# EAGLE board 5hp proto (EAGLE 9.2.2)
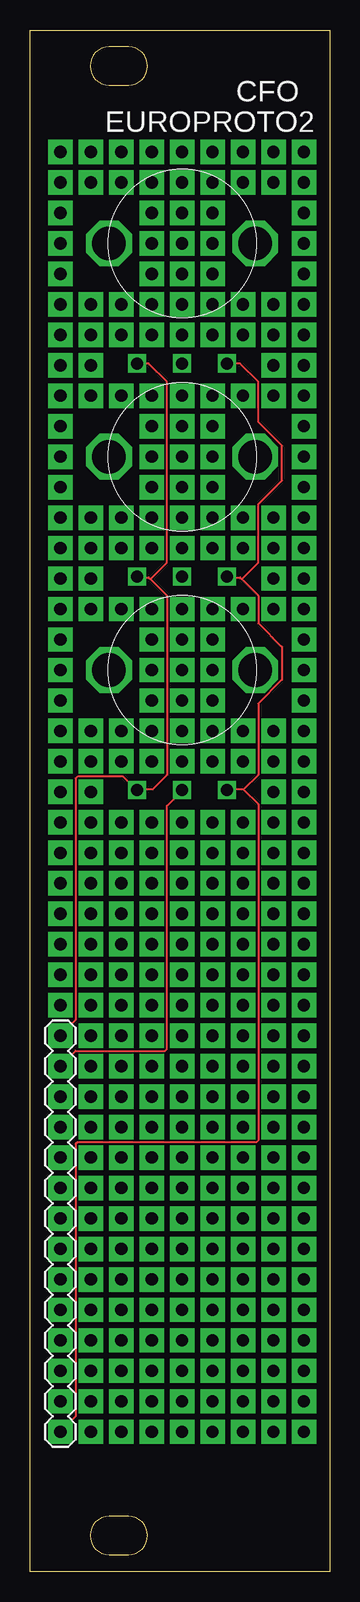
[diagram p0: board, top side]
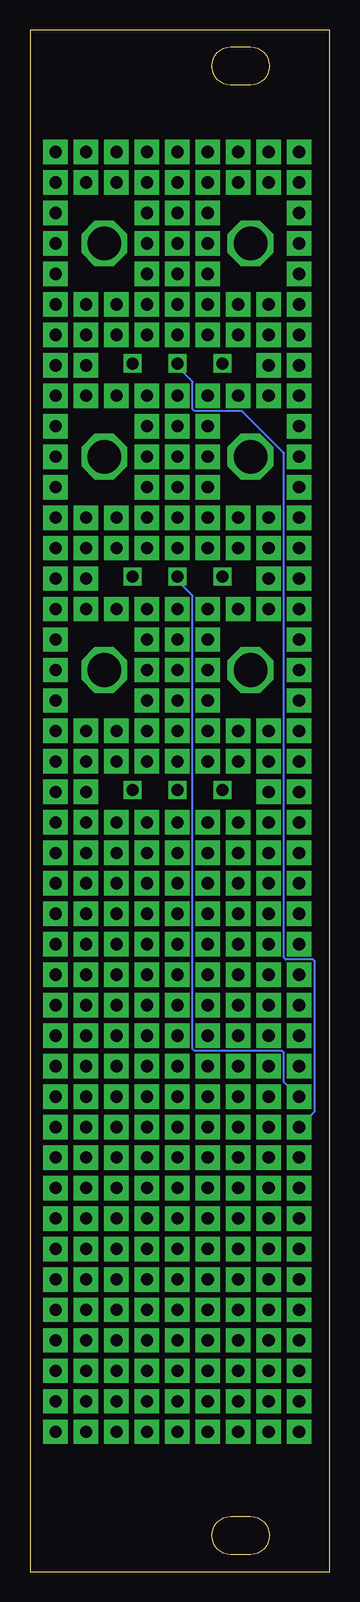
[diagram p1: board, bottom side, seen from below]

Size 25 x 128.5 mm. Coordinates in mm from the lower left corner, seen from the top.
Outline: 25,0 0,0 0,128.5 25,128.5 25,0
Outline: 8.21,127.1 6.62,127.1 6.29,127.07 5.99,126.97 5.72,126.83 5.48,126.63 5.29,126.4 5.14,126.12 5.05,125.82 5.01,125.5 5.05,125.18 5.14,124.88 5.29,124.61 5.48,124.37 5.72,124.17 5.99,124.03 6.29,123.93 6.62,123.9 8.21,123.9 8.54,123.93 8.84,124.03 9.11,124.17 9.35,124.37 9.54,124.61 9.69,124.88 9.78,125.18 9.81,125.5 9.78,125.82 9.69,126.12 9.54,126.4 9.35,126.63 9.11,126.83 8.84,126.97 8.54,127.07 8.21,127.1
Outline: 8.21,4.6 6.62,4.6 6.29,4.57 5.99,4.47 5.72,4.33 5.48,4.13 5.29,3.9 5.14,3.62 5.05,3.32 5.01,3 5.05,2.68 5.14,2.38 5.29,2.11 5.48,1.87 5.72,1.67 5.99,1.53 6.29,1.43 6.62,1.4 8.21,1.4 8.54,1.43 8.84,1.53 9.11,1.67 9.35,1.87 9.54,2.11 9.69,2.38 9.78,2.68 9.81,3 9.78,3.32 9.69,3.62 9.54,3.9 9.35,4.13 9.11,4.33 8.84,4.47 8.54,4.57 8.21,4.6
Copper layers (1*16): Top 0.035mm / dielectric 1.5mm / Bottom 0.035mm
Design rules "default": minimum track width 6mil, minimum drill 0.35mm, track to track 6mil, track to pad 6mil, pad to pad 6mil, via to via 6mil, smd to smd 6mil, copper to edge 40mil, drill to drill 6mil, minimum pad ring 10mil, minimum via ring 8mil, stop-mask expansion 4mil, vias tented up to drill 0mil, thermal gap 10mil

## Footprints (pad centres in the part's own frame; a part is rotated, then mirrored left to right if it is on the bottom)
1X14 = drill 1.016 pad 2.032 square: 1 0,0; 2 2.54,0; 3 5.08,0; 4 7.62,0; 5 10.16,0; 6 12.7,0; 7 15.24,0; 8 17.78,0; 9 20.32,0; 10 22.86,0; 11 25.4,0; 12 27.94,0; 13 30.48,0; 14 33.02,0
POT_V = drill 1 square: P1 -3.75,-10; P2 0,-10; P3 3.75,-10 | drill 1.016 pad 2.032 square: P$1 0,0; P$2 2.54,0; P$3 -2.54,0; P$4 -2.54,2.54; P$5 0,2.54; P$6 2.54,2.54; P$7 2.54,-2.54; P$8 0,-2.54; P$9 -2.54,-2.54; P$10 -2.54,5.08; P$11 0,5.08; P$12 2.54,5.08; P$13 5.08,5.08; P$14 7.62,5.08; P$15 -5.08,5.08; P$16 -7.62,5.08; P$26 -2.54,-7.62; P$27 0,-7.62; P$28 2.54,-7.62; P$29 5.08,-7.62; P$30 7.62,-7.62; P$31 -5.08,-7.62; P$32 -7.62,-7.62; P$33 -2.54,-5.08; P$34 0,-5.08; P$35 2.54,-5.08; P$36 5.08,-5.08; P$37 7.62,-5.08; P$38 -5.08,-5.08; P$39 -7.62,-5.08; P$40 -7.62,-10.16; P$41 7.62,-10.16 | drill 2.8 octagon: S1 -6.1,0; S2 6.1,0

## Placement (x,y rotation side)
J2  [1X14]  2.54,44.67 270 top
VR1  [POT_V]  12.7,75.15 0 top
VR2  [POT_V]  12.7,92.93 0 top
VR3  [POT_V]  12.7,110.71 0 top

## Library data of the parts
J2 VR1-VR3 = CFO

## Nets
5V: J2.14 VR1.P3 VR2.P3 VR3.P3
GND: J2.1 VR1.P1 VR2.P1 VR3.P1
POT1: J2.2 VR1.P2
POT2: J2.3 VR2.P2
POT3: J2.4 VR3.P2

## Tracks (layer width: path | path; a pad name or v marks a point on that pad's centre or on a via)
5V
  Top 0.152: 17.83,65.19 16.46,65.19 VR1.P3 | 17.83,65.19 19.05,66.41 19.05,72.35 21.03,74.34 21.03,77.08 19.05,79.06 19.05,81.35 17.68,82.72 | 17.68,82.72 17.53,82.87 16.46,82.87 VR2.P3 | 17.68,82.72 19.05,84.09 19.05,88.97 21.03,90.95 21.03,93.84 19.05,95.82 19.05,99.18 17.53,100.7 VR3.P3 | J2.14 3.81,12.92 3.81,35.63 3.96,35.78 18.9,35.78 19.05,35.93 19.05,63.97 17.83,65.19
GND
  Top 0.152: 10.06,82.72 9.91,82.87 8.99,82.87 VR2.P1 | 10.06,82.72 11.43,81.35 11.43,66.41 10.21,65.19 8.99,65.19 VR1.P1 8.84,65.19 7.77,66.26 3.96,66.26 3.81,66.11 3.81,45.99 2.59,44.77 J2.1 | 10.06,82.72 11.43,84.09 11.43,99.18 9.91,100.7 8.99,100.7 VR3.P1
N$1  (via drill 1.02 pad 2.03)
  other vias: 2.54,47.21
N$2  (via drill 1.02 pad 2.03)
  other vias: 22.86,62.45
N$3  (via drill 1.02 pad 2.03)
  other vias: 20.32,62.45
N$4  (via drill 1.02 pad 2.03)
  other vias: 20.32,59.91
N$5  (via drill 1.02 pad 2.03)
  other vias: 22.86,59.91
N$6  (via drill 1.02 pad 2.03)
  other vias: 22.86,57.37
N$7  (via drill 1.02 pad 2.03)
  other vias: 20.32,57.37
N$8  (via drill 1.02 pad 2.03)
  other vias: 20.32,54.83
N$9  (via drill 1.02 pad 2.03)
  other vias: 22.86,54.83
N$10  (via drill 1.02 pad 2.03)
  other vias: 2.54,118.33
N$11  (via drill 1.02 pad 2.03)
  other vias: 22.86,52.29
N$12  (via drill 1.02 pad 2.03)
  other vias: 17.78,62.45
N$13  (via drill 1.02 pad 2.03)
  other vias: 15.24,62.45
N$14  (via drill 1.02 pad 2.03)
  other vias: 12.7,62.45
N$15  (via drill 1.02 pad 2.03)
  other vias: 10.16,62.45
N$16  (via drill 1.02 pad 2.03)
  other vias: 7.62,62.45
N$17  (via drill 1.02 pad 2.03)
  other vias: 5.08,62.45
N$18  (via drill 1.02 pad 2.03)
  other vias: 2.54,62.45
N$19  (via drill 1.02 pad 2.03)
  other vias: 2.54,59.91
N$20  (via drill 1.02 pad 2.03)
  other vias: 5.08,59.91
N$21  (via drill 1.02 pad 2.03)
  other vias: 7.62,59.91
N$22  (via drill 1.02 pad 2.03)
  other vias: 10.16,59.91
N$23  (via drill 1.02 pad 2.03)
  other vias: 12.7,59.91
N$24  (via drill 1.02 pad 2.03)
  other vias: 15.24,59.91
N$25  (via drill 1.02 pad 2.03)
  other vias: 17.78,59.91
N$26  (via drill 1.02 pad 2.03)
  other vias: 20.32,52.29
N$27  (via drill 1.02 pad 2.03)
  other vias: 5.08,118.33
N$28  (via drill 1.02 pad 2.03)
  other vias: 7.62,118.33
N$29  (via drill 1.02 pad 2.03)
  other vias: 20.32,49.75
N$30  (via drill 1.02 pad 2.03)
  other vias: 17.78,57.37
N$31  (via drill 1.02 pad 2.03)
  other vias: 15.24,57.37
N$32  (via drill 1.02 pad 2.03)
  other vias: 12.7,57.37
N$33  (via drill 1.02 pad 2.03)
  other vias: 10.16,57.37
N$34  (via drill 1.02 pad 2.03)
  other vias: 7.62,57.37
N$35  (via drill 1.02 pad 2.03)
  other vias: 5.08,57.37
N$36  (via drill 1.02 pad 2.03)
  other vias: 2.54,57.37
N$37  (via drill 1.02 pad 2.03)
  other vias: 2.54,54.83
N$38  (via drill 1.02 pad 2.03)
  other vias: 5.08,54.83
N$39  (via drill 1.02 pad 2.03)
  other vias: 7.62,54.83
N$40  (via drill 1.02 pad 2.03)
  other vias: 10.16,54.83
N$41  (via drill 1.02 pad 2.03)
  other vias: 12.7,54.83
N$42  (via drill 1.02 pad 2.03)
  other vias: 15.24,54.83
N$43  (via drill 1.02 pad 2.03)
  other vias: 17.78,54.83
N$44  (via drill 1.02 pad 2.03)
  other vias: 22.86,49.75
N$45  (via drill 1.02 pad 2.03)
  other vias: 22.86,47.21
N$46  (via drill 1.02 pad 2.03)
  other vias: 20.32,47.21
N$47  (via drill 1.02 pad 2.03)
  other vias: 20.32,44.67
N$48  (via drill 1.02 pad 2.03)
  other vias: 17.78,52.29
N$49  (via drill 1.02 pad 2.03)
  other vias: 15.24,52.29
N$50  (via drill 1.02 pad 2.03)
  other vias: 12.7,52.29
N$51  (via drill 1.02 pad 2.03)
  other vias: 10.16,52.29
N$52  (via drill 1.02 pad 2.03)
  other vias: 7.62,52.29
N$53  (via drill 1.02 pad 2.03)
  other vias: 5.08,52.29
N$54  (via drill 1.02 pad 2.03)
  other vias: 2.54,52.29
N$55  (via drill 1.02 pad 2.03)
  other vias: 2.54,49.75
N$56  (via drill 1.02 pad 2.03)
  other vias: 5.08,49.75
N$57  (via drill 1.02 pad 2.03)
  other vias: 5.08,47.21
N$58  (via drill 1.02 pad 2.03)
  other vias: 5.08,44.67
N$59  (via drill 1.02 pad 2.03)
  other vias: 5.08,42.13
N$60  (via drill 1.02 pad 2.03)
  other vias: 5.08,39.59
N$61  (via drill 1.02 pad 2.03)
  other vias: 5.08,37.05
N$62  (via drill 1.02 pad 2.03)
  other vias: 5.08,34.51
N$63  (via drill 1.02 pad 2.03)
  other vias: 5.08,31.97
N$64  (via drill 1.02 pad 2.03)
  other vias: 5.08,29.43
N$65  (via drill 1.02 pad 2.03)
  other vias: 5.08,26.89
N$66  (via drill 1.02 pad 2.03)
  other vias: 5.08,24.35
N$67  (via drill 1.02 pad 2.03)
  other vias: 5.08,21.81
N$68  (via drill 1.02 pad 2.03)
  other vias: 5.08,19.27
N$69  (via drill 1.02 pad 2.03)
  other vias: 5.08,16.73
N$70  (via drill 1.02 pad 2.03)
  other vias: 5.08,14.19
N$71  (via drill 1.02 pad 2.03)
  other vias: 7.62,14.19
N$72  (via drill 1.02 pad 2.03)
  other vias: 7.62,16.73
N$73  (via drill 1.02 pad 2.03)
  other vias: 7.62,19.27
N$74  (via drill 1.02 pad 2.03)
  other vias: 7.62,21.81
N$75  (via drill 1.02 pad 2.03)
  other vias: 7.62,24.35
N$76  (via drill 1.02 pad 2.03)
  other vias: 7.62,26.89
N$77  (via drill 1.02 pad 2.03)
  other vias: 7.62,29.43
N$78  (via drill 1.02 pad 2.03)
  other vias: 7.62,31.97
N$79  (via drill 1.02 pad 2.03)
  other vias: 7.62,34.51
N$80  (via drill 1.02 pad 2.03)
  other vias: 7.62,37.05
N$81  (via drill 1.02 pad 2.03)
  other vias: 7.62,39.59
N$82  (via drill 1.02 pad 2.03)
  other vias: 7.62,42.13
N$83  (via drill 1.02 pad 2.03)
  other vias: 7.62,44.67
N$84  (via drill 1.02 pad 2.03)
  other vias: 7.62,47.21
N$85  (via drill 1.02 pad 2.03)
  other vias: 7.62,49.75
N$86  (via drill 1.02 pad 2.03)
  other vias: 10.16,49.75
N$87  (via drill 1.02 pad 2.03)
  other vias: 10.16,47.21
N$88  (via drill 1.02 pad 2.03)
  other vias: 10.16,44.67
N$89  (via drill 1.02 pad 2.03)
  other vias: 10.16,42.13
N$90  (via drill 1.02 pad 2.03)
  other vias: 10.16,39.59
N$91  (via drill 1.02 pad 2.03)
  other vias: 10.16,37.05
N$92  (via drill 1.02 pad 2.03)
  other vias: 10.16,34.51
N$93  (via drill 1.02 pad 2.03)
  other vias: 10.16,31.97
N$94  (via drill 1.02 pad 2.03)
  other vias: 10.16,29.43
N$95  (via drill 1.02 pad 2.03)
  other vias: 10.16,26.89
N$96  (via drill 1.02 pad 2.03)
  other vias: 10.16,24.35
N$97  (via drill 1.02 pad 2.03)
  other vias: 10.16,21.81
N$98  (via drill 1.02 pad 2.03)
  other vias: 10.16,19.27
N$99  (via drill 1.02 pad 2.03)
  other vias: 10.16,16.73
N$100  (via drill 1.02 pad 2.03)
  other vias: 12.7,49.75
N$101  (via drill 1.02 pad 2.03)
  other vias: 15.24,49.75
N$102  (via drill 1.02 pad 2.03)
  other vias: 17.78,49.75
N$103  (via drill 1.02 pad 2.03)
  other vias: 22.86,44.67
N$104  (via drill 1.02 pad 2.03)
  other vias: 22.86,42.13
N$105  (via drill 1.02 pad 2.03)
  other vias: 20.32,42.13
N$106  (via drill 1.02 pad 2.03)
  other vias: 20.32,39.59
N$107  (via drill 1.02 pad 2.03)
  other vias: 17.78,47.21
N$108  (via drill 1.02 pad 2.03)
  other vias: 15.24,47.21
N$109  (via drill 1.02 pad 2.03)
  other vias: 12.7,47.21
N$110  (via drill 1.02 pad 2.03)
  other vias: 12.7,44.67
N$111  (via drill 1.02 pad 2.03)
  other vias: 15.24,44.67
N$112  (via drill 1.02 pad 2.03)
  other vias: 17.78,44.67
N$113  (via drill 1.02 pad 2.03)
  other vias: 22.86,39.59
N$114  (via drill 1.02 pad 2.03)
  other vias: 22.86,37.05
N$115  (via drill 1.02 pad 2.03)
  other vias: 20.32,37.05
N$116  (via drill 1.02 pad 2.03)
  other vias: 20.32,34.51
N$117  (via drill 1.02 pad 2.03)
  other vias: 17.78,42.13
N$118  (via drill 1.02 pad 2.03)
  other vias: 15.24,42.13
N$119  (via drill 1.02 pad 2.03)
  other vias: 12.7,42.13
N$120  (via drill 1.02 pad 2.03)
  other vias: 12.7,39.59
N$121  (via drill 1.02 pad 2.03)
  other vias: 15.24,39.59
N$122  (via drill 1.02 pad 2.03)
  other vias: 17.78,39.59
N$123  (via drill 1.02 pad 2.03)
  other vias: 22.86,34.51
N$124  (via drill 1.02 pad 2.03)
  other vias: 22.86,31.97
N$125  (via drill 1.02 pad 2.03)
  other vias: 20.32,31.97
N$126  (via drill 1.02 pad 2.03)
  other vias: 20.32,29.43
N$127  (via drill 1.02 pad 2.03)
  other vias: 17.78,37.05
N$128  (via drill 1.02 pad 2.03)
  other vias: 15.24,37.05
N$129  (via drill 1.02 pad 2.03)
  other vias: 12.7,37.05
N$130  (via drill 1.02 pad 2.03)
  other vias: 12.7,34.51
N$131  (via drill 1.02 pad 2.03)
  other vias: 15.24,34.51
N$132  (via drill 1.02 pad 2.03)
  other vias: 17.78,34.51
N$133  (via drill 1.02 pad 2.03)
  other vias: 22.86,29.43
N$134  (via drill 1.02 pad 2.03)
  other vias: 22.86,26.89
N$135  (via drill 1.02 pad 2.03)
  other vias: 20.32,26.89
N$136  (via drill 1.02 pad 2.03)
  other vias: 20.32,24.35
N$137  (via drill 1.02 pad 2.03)
  other vias: 17.78,31.97
N$138  (via drill 1.02 pad 2.03)
  other vias: 15.24,31.97
N$139  (via drill 1.02 pad 2.03)
  other vias: 12.7,31.97
N$140  (via drill 1.02 pad 2.03)
  other vias: 12.7,29.43
N$141  (via drill 1.02 pad 2.03)
  other vias: 15.24,29.43
N$142  (via drill 1.02 pad 2.03)
  other vias: 17.78,29.43
N$143  (via drill 1.02 pad 2.03)
  other vias: 22.86,24.35
N$144  (via drill 1.02 pad 2.03)
  other vias: 20.32,19.27
N$145  (via drill 1.02 pad 2.03)
  other vias: 20.32,21.81
N$146  (via drill 1.02 pad 2.03)
  other vias: 22.86,21.81
N$147  (via drill 1.02 pad 2.03)
  other vias: 17.78,26.89
N$148  (via drill 1.02 pad 2.03)
  other vias: 15.24,26.89
N$149  (via drill 1.02 pad 2.03)
  other vias: 12.7,26.89
N$150  (via drill 1.02 pad 2.03)
  other vias: 12.7,24.35
N$151  (via drill 1.02 pad 2.03)
  other vias: 15.24,24.35
N$152  (via drill 1.02 pad 2.03)
  other vias: 17.78,24.35
N$153  (via drill 1.02 pad 2.03)
  other vias: 12.7,21.81
N$154  (via drill 1.02 pad 2.03)
  other vias: 10.16,14.19
N$155  (via drill 1.02 pad 2.03)
  other vias: 12.7,14.19
N$156  (via drill 1.02 pad 2.03)
  other vias: 12.7,16.73
N$157  (via drill 1.02 pad 2.03)
  other vias: 12.7,19.27
N$158  (via drill 1.02 pad 2.03)
  other vias: 15.24,19.27
N$159  (via drill 1.02 pad 2.03)
  other vias: 15.24,21.81
N$160  (via drill 1.02 pad 2.03)
  other vias: 17.78,21.81
N$161  (via drill 1.02 pad 2.03)
  other vias: 22.86,19.27
N$162  (via drill 1.02 pad 2.03)
  other vias: 22.86,16.73
N$163  (via drill 1.02 pad 2.03)
  other vias: 20.32,16.73
N$164  (via drill 1.02 pad 2.03)
  other vias: 20.32,14.19
N$165  (via drill 1.02 pad 2.03)
  other vias: 22.86,14.19
N$166  (via drill 1.02 pad 2.03)
  other vias: 22.86,11.65
N$167  (via drill 1.02 pad 2.03)
  other vias: 17.78,19.27
N$168  (via drill 1.02 pad 2.03)
  other vias: 17.78,16.73
N$169  (via drill 1.02 pad 2.03)
  other vias: 15.24,16.73
N$170  (via drill 1.02 pad 2.03)
  other vias: 15.24,14.19
N$171  (via drill 1.02 pad 2.03)
  other vias: 17.78,14.19
N$172  (via drill 1.02 pad 2.03)
  other vias: 20.32,11.65
N$173  (via drill 1.02 pad 2.03)
  other vias: 22.86,115.79
N$174  (via drill 1.02 pad 2.03)
  other vias: 22.86,113.25
N$175  (via drill 1.02 pad 2.03)
  other vias: 22.86,110.71
N$176  (via drill 1.02 pad 2.03)
  other vias: 22.86,108.17
N$177  (via drill 1.02 pad 2.03)
  other vias: 22.86,105.63
N$178  (via drill 1.02 pad 2.03)
  other vias: 17.78,11.65
N$179  (via drill 1.02 pad 2.03)
  other vias: 15.24,11.65
N$180  (via drill 1.02 pad 2.03)
  other vias: 12.7,11.65
N$181  (via drill 1.02 pad 2.03)
  other vias: 10.16,11.65
N$182  (via drill 1.02 pad 2.03)
  other vias: 7.62,11.65
N$183  (via drill 1.02 pad 2.03)
  other vias: 5.08,11.65
N$184  (via drill 1.02 pad 2.03)
  other vias: 10.16,118.33
N$185  (via drill 1.02 pad 2.03)
  other vias: 22.86,103.09
N$186  (via drill 1.02 pad 2.03)
  other vias: 22.86,100.55
N$187  (via drill 1.02 pad 2.03)
  other vias: 12.7,118.33
N$188  (via drill 1.02 pad 2.03)
  other vias: 15.24,118.33
N$189  (via drill 1.02 pad 2.03)
  other vias: 22.86,118.33
N$190  (via drill 1.02 pad 2.03)
  other vias: 22.86,98.01
N$191  (via drill 1.02 pad 2.03)
  other vias: 22.86,95.47
N$192  (via drill 1.02 pad 2.03)
  other vias: 22.86,92.93
N$193  (via drill 1.02 pad 2.03)
  other vias: 22.86,90.39
N$194  (via drill 1.02 pad 2.03)
  other vias: 22.86,87.85
N$195  (via drill 1.02 pad 2.03)
  other vias: 22.86,85.31
N$196  (via drill 1.02 pad 2.03)
  other vias: 22.86,82.77
N$197  (via drill 1.02 pad 2.03)
  other vias: 22.86,80.23
N$198  (via drill 1.02 pad 2.03)
  other vias: 22.86,77.69
N$199  (via drill 1.02 pad 2.03)
  other vias: 22.86,75.15
N$200  (via drill 1.02 pad 2.03)
  other vias: 22.86,72.61
N$201  (via drill 1.02 pad 2.03)
  other vias: 22.86,70.07
N$202  (via drill 1.02 pad 2.03)
  other vias: 22.86,67.53
N$203  (via drill 1.02 pad 2.03)
  other vias: 22.86,64.99
N$204  (via drill 1.02 pad 2.03)
  other vias: 2.54,115.79
N$205  (via drill 1.02 pad 2.03)
  other vias: 2.54,113.25
N$206  (via drill 1.02 pad 2.03)
  other vias: 2.54,110.71
N$207  (via drill 1.02 pad 2.03)
  other vias: 2.54,108.17
N$208  (via drill 1.02 pad 2.03)
  other vias: 2.54,105.63
N$209  (via drill 1.02 pad 2.03)
  other vias: 2.54,103.09
N$210  (via drill 1.02 pad 2.03)
  other vias: 2.54,100.55
N$211  (via drill 1.02 pad 2.03)
  other vias: 2.54,98.01
N$212  (via drill 1.02 pad 2.03)
  other vias: 2.54,95.47
N$213  (via drill 1.02 pad 2.03)
  other vias: 2.54,92.93
N$214  (via drill 1.02 pad 2.03)
  other vias: 2.54,90.39
N$215  (via drill 1.02 pad 2.03)
  other vias: 2.54,87.85
N$216  (via drill 1.02 pad 2.03)
  other vias: 2.54,85.31
N$217  (via drill 1.02 pad 2.03)
  other vias: 2.54,82.77
N$218  (via drill 1.02 pad 2.03)
  other vias: 2.54,80.23
N$219  (via drill 1.02 pad 2.03)
  other vias: 2.54,77.69
N$220  (via drill 1.02 pad 2.03)
  other vias: 2.54,75.15
N$221  (via drill 1.02 pad 2.03)
  other vias: 2.54,72.61
N$222  (via drill 1.02 pad 2.03)
  other vias: 2.54,70.07
N$223  (via drill 1.02 pad 2.03)
  other vias: 2.54,67.53
N$224  (via drill 1.02 pad 2.03)
  other vias: 2.54,64.99
N$225  (via drill 1.02 pad 2.03)
  other vias: 17.78,118.33
N$226  (via drill 1.02 pad 2.03)
  other vias: 20.32,118.33
POT1
  Top 0.152: J2.2 3.81,43.4 11.28,43.4 11.43,43.55 11.43,63.82 12.65,65.04 VR1.P2
POT2
  Bottom 0.152: VR2.P2 12.65,82.87 12.65,82.57 11.43,81.35 11.43,43.55 11.28,43.4 3.96,43.4 3.81,43.25 3.81,40.81 2.59,39.59 J2.3
POT3
  Bottom 0.152: J2.4 1.22,38.37 1.22,50.87 1.37,51.02 3.66,51.02 3.81,51.17 3.81,93.23 7.32,96.74 11.28,96.74 11.43,96.89 11.43,99.18 12.65,100.4 12.65,100.7 VR3.P2

## Text on the board
tNames: CFO | EUROPROTO2